# Altium PCB Copy of PCB3.PcbDoc
Units mm, origin at the board's own origin, x right, y up, seen from the top; angles counter-clockwise.
Board outline 100 x 50 mm, 2 copper layers (Top Layer, Bottom Layer); 13 components, 10 nets, 54 pads, 0 vias.
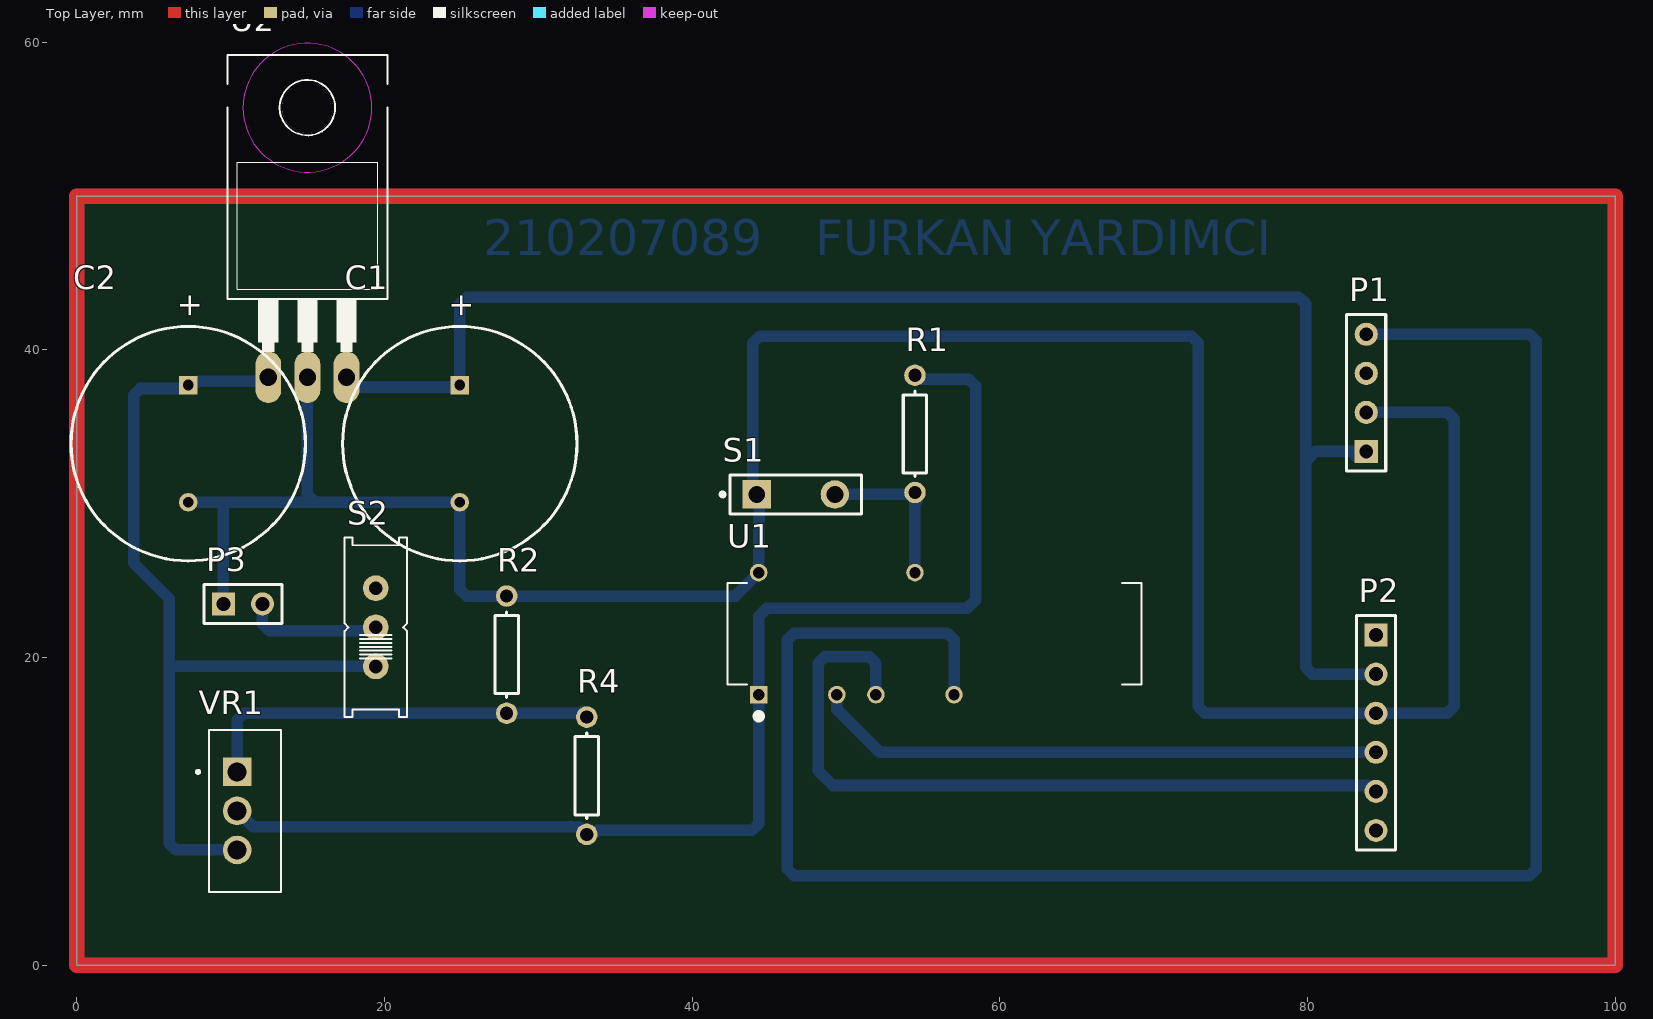
[diagram p0: Top Layer view]
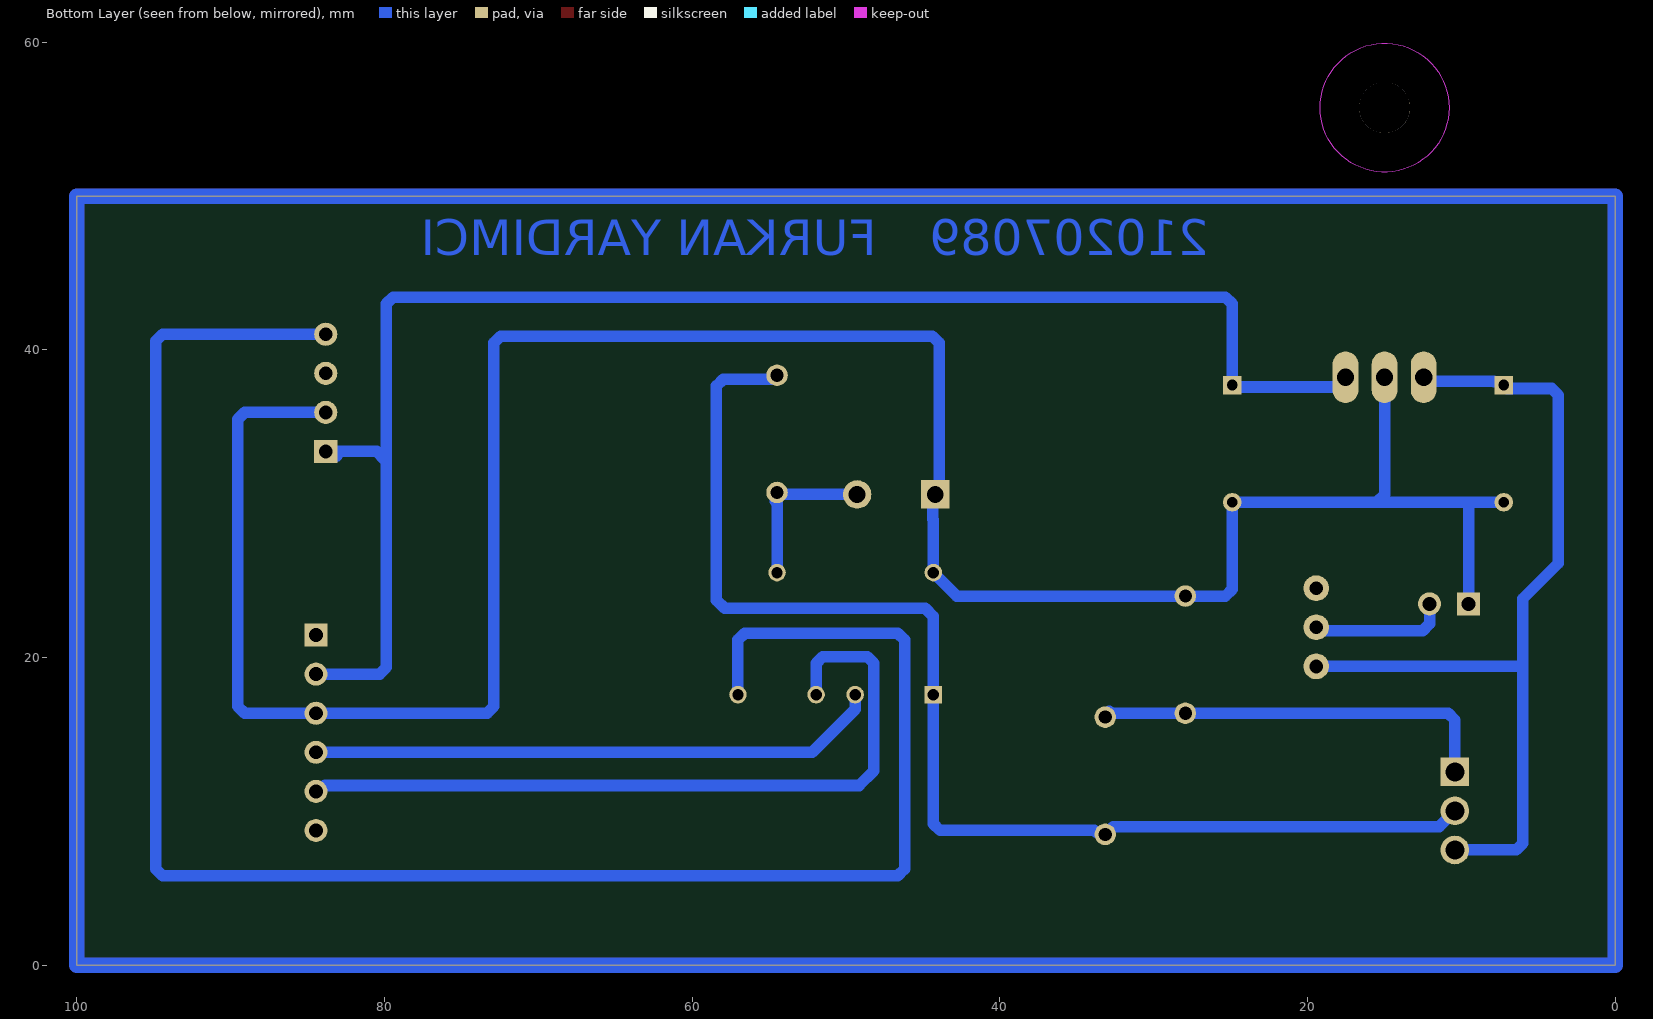
[diagram p1: Bottom Layer view, seen from below]

## Layer stack, top to bottom
Top Solder: solder mask 0.0102, Solder Resist, Dk 3.5
Top Layer: signal copper 0.0356
Dielectric 1: dielectric 0.32, FR-4, Dk 4.8
Bottom Layer: signal copper 0.0356
Bottom Solder: solder mask 0.0102, Solder Resist, Dk 3.5

## Board outline
0,0 0,50 100,50 100,0

## Design rules (kind name [scope] priority, off if disabled: settings)
Clearance [All] p1: gap=0.254 ignorepadtopadclearanceinfootprint=FALSE except(0: Arc-Hole Track-Hole SMDPad-Hole THPad-Hole Via-Hole Fill-Hole Poly-Hole Region-Hole Text-Hole)
PolygonConnect [All] p1: connectstyle=Relief reliefconductorwidth=0.254 reliefentries=4 polygonreliefangle="90 Angle" airgapwidth=0.254
RoutingVias [All] p1: holewidth=0.711 width=1.27 viastyle="Through Hole" minholewidth=0.711 minwidth=1.27 maxholewidth=0.711 maxwidth=1.27
SolderMaskExpansion [All] p1: expansion=0.102 istentingtop=FALSE
Width [All] p1: maxlimit=1 minlimit=0.7 preferedwidth=0.75 minimp=50.000000 maximp=50.000000 favimp=50.000000
30 further rules are at their usual default settings.

## Components (designator, comment, footprint, x,y, rotation, side; value= is the part's Value field where it differs from the comment)
C1 "Cap Pol1" RB7.6-15 24.892,33.909 r90 top value=0.1
C2 "Cap Pol1" RB7.6-15 7.239,33.909 r90 top value=0.1
P1 "Header 4" HDR1X4 83.82,33.401 r90 top
P2 "hc05" HDR1X6 84.455,21.463 r270 top
P3 "Header 2" HDR1X2 9.525,23.495 r0 top
R1 "Res1" AXIAL-0.3 54.483,34.544 r270 top value=10K
R2 "Res1" AXIAL-0.3 27.94,20.193 r90 top value=390
R4 "Res1" AXIAL-0.3 33.147,12.319 r270 top value=220
S1 "SW-PB" SPST-2 46.736,30.607 r0 top
S2 "EG1218" EG1218 19.431,21.971 r90 top
U1 "MSP430G2553IN20" DIP794W45P254L2692H508Q20 55.753,21.557 r90 top
U2 "LM7805" TO220 14.986,44.577 r0 top
VR1 "LM317T" TO254P1054X470X1955-3 10.414,10.033 r270 top

## Footprints (in the part's own frame and the unit in brackets; to place one, negate y for a bottom-side part, rotate by r counter-clockwise, add the part's x,y. Pads: shape width x height; smd on the part's side, far side on the other; paste and mask are expansions set on the pad)
AXIAL-0.3 [mm] "Axial Device, Thru-Hole; 2 Leads; 0.3 in Pin Spacing"
  round 1.4 hole 0.85: 1(-3.81,0) 2(3.81,0)
  silkscreen extent -2.77,-0.76 2.77,0.76
DIP794W45P254L2692H508Q20 [mm]
  rect 1.14x1.14 hole 0.74: 1(-3.97,11.43)
  round 1.14 on Mech1: 2(-3.97,8.89) 5(-3.97,1.27) 7(-3.97,-3.81) 8(-3.97,-6.35) 9(-3.97,-8.89) 10(-3.97,-11.43) 11(3.97,-11.43) 12(3.97,-8.89) 13(3.97,-6.35) 14(3.97,-3.81) 15(3.97,-1.27) 17(3.97,3.81) 18(3.97,6.35) 19(3.97,8.89)
  round 1.14 hole 0.74: 3(-3.97,6.35) 4(-3.97,3.81) 6(-3.97,-1.27) 16(3.97,1.27) 20(3.97,11.43)
  silkscreen extent -5.57,-13.46 3.3,13.46
EG1218 [mil]
  round 66 hole 35.43: O(-100,0) P(0,0) S(100,0)
  silkscreen extent -230,-80 230,80
HDR1X2 [mm] "Connector; Header; 2 Position"
  rect 1.5x1.5 hole 0.9: 1(0,0)
  round 1.5 hole 0.9: 2(2.54,0)
  silkscreen extent -1.27,-1.27 3.81,1.27
HDR1X4 [mm] "Connector; Header; 4 Position"
  rect 1.5x1.5 hole 0.9: 1(0,0)
  round 1.5 hole 0.9: 2(2.54,0) 3(5.08,0) 4(7.62,0)
  silkscreen extent -1.27,-1.27 8.89,1.27
HDR1X6 [mm] "Connector; Header; 6 Position"
  rect 1.5x1.5 hole 0.9: 1(0,0)
  round 1.5 hole 0.9: 2(2.54,0) 3(5.08,0) 4(7.62,0) 5(10.16,0) 6(12.7,0)
  silkscreen extent -1.27,-1.27 13.97,1.27
RB7.6-15 [mm] "Polarized Capacitor (Radial); 2 Leads"
  rect 1.2x1.2 hole 0.7: 1(3.81,0)
  round 1.2 hole 0.7: 2(-3.81,0)
  silkscreen extent -7.62,-7.62 7.62,7.62
SPST-2 [mm] "Switch; 2 Leads"
  rect 1.85x1.85 hole 1.1: 1(-2.54,0)
  round 1.85 hole 1.1: 2(2.54,0)
  silkscreen extent -4.89,-1.27 4.28,1.27
TO220 [mil]
  oval 66x132 hole 44: 1(-100,-250) 2(0,-250) 3(100,-250)
  round 130 hole 130 unplated: ""(0,440)
  Keep-Out Layer circle w0: c0,440 r165
  Keep-Out Layer circle w0: c0,440 r165
  silkscreen extent -205,-185 205,575
TO254P1054X470X1955-3 [mm]
  rect 1.86x1.86 hole 1.24: 1(-2.54,0)
  round 1.86 hole 1.24: 2(0,0) 3(2.54,0)
  silkscreen extent -5.27,-2.64 5.27,2.86

## Part data
C1 C2: "Polarized Capacitor (Radial)", LatestRevisionDate=17-Jul-2002, LatestRevisionNote="Re-released for DXP Platform.", PackageDescription="Polarized Capacitor (Radial); 2 Leads", PackageReference=RB7.6-15, Published=8-Jun-2000, Publisher="Altium Limited"
P1: "Header, 4-Pin", LatestRevisionDate=17-Jul-2002, LatestRevisionNote="Re-released for DXP Platform.", Publisher="Altium Limited"
P2: library part "Header 6", "Header, 6-Pin", LatestRevisionDate=17-Jul-2002, LatestRevisionNote="Re-released for DXP Platform.", Publisher="Altium Limited"
P3: "Header, 2-Pin", LatestRevisionDate=17-Jul-2002, LatestRevisionNote="Re-released for DXP Platform.", Publisher="Altium Limited"
R1 R2 R4: "Resistor", LatestRevisionDate=17-Jul-2002, LatestRevisionNote="Re-released for DXP Platform.", PackageDescription="Axial Device, Thru-Hole; 2 Leads; 0.3 in Pin Spacing", PackageReference=AXIAL-0.3, Published=8-Jun-2000, Publisher="Altium Limited"
S1: "Switch", LatestRevisionDate=17-Jul-2002, LatestRevisionNote="Re-released for DXP Platform.", PackageDescription="Switch; 2 Leads", PackageReference=SPST-2, Published=24-Mar-1999, Publisher="Altium Limited"
S2: "æ»‘å‹•é–‹é—œSPDTé€šå­”", Package="Custom package E-Switch", Availability=Unavailable, MF=E-Switch, MP=EG1218, Price=None, SnapEDA_Link=https://www.snapeda.com/parts/EG1218/E-Switch/view-part/13895/?ref=snap
U1: "MSP430 MSP430G2xx Microcontroller IC 16-Bit 16MHz 16KB _16K x 8_ FLASH 20-PDIP", Package="PDIP-20 Texas Instruments", Availability=Unavailable, MF="Texas Instruments", MP=MSP430G2553IN20, Price=None, SnapEDA_Link=https://www.snapeda.com/parts/MSP430G2553IN20/Texas%20Instruments/view-part/46372/?ref=snap
U2: "Linear Voltage Regulator IC 1 Output 1.5A SOT-223-4", Package="TO-220 Texas Instruments", Availability=Unavailable, MF="Texas Instruments", MP=LM7805, Price=None, SnapEDA_Link=https://www.snapeda.com/parts/LM7805/Texas%20Instruments/view-part/2302466/?ref=snap
VR1: "1.5-A, 40-V, adjustable linear voltage regulator 3-TO-220", Package="TO-220-3 Texas Instruments", Arrow_Electronics-Purchase-URL=https://snapeda.com/shop?store=Arrow+Electronics&id=2756289, Availability=Unavailable, DigiKey-Purchase-URL=https://snapeda.com/shop?store=DigiKey&id=2756289, MF="Texas Instruments", Mouser-Purchase-URL=https://snapeda.com/shop?store=Mouser&id=2756289, MP=LM317T, Price=None, SnapEDA_Link=https://www.snapeda.com/parts/LM317T/Texas%20Instruments/view-part/2756289/?ref=snap

## Nets (pads, with @x,y where several pads share a name; then routed paths per layer and width w, separated by ;. In a path a pad name is that pad's centre, name@x,y a point inside that pad or via, vN(x,y) a via of type N, cw(c..) or ccw(c..) an arc to the next point about the centre after c; other vN are vias at no path point)
GND: C1.2 C2.2 P1.2 P2.3 P3.1 R2.2 S1.1 U1.20 U2.2 | length 168.2
  Bottom Layer w0.75: C2.2 9.652,30.099 ; P3.1 9.525,29.972 9.652,30.099 ; U2.2 14.986,30.607 15.494,30.099 ; P1.2 89.096,35.941 89.535,35.502 89.535,16.822 89.096,16.383 P2.3 73.337,16.383 72.898,16.822 72.898,40.455 72.459,40.894 44.381,40.894 43.942,40.455 43.942,30.942 44.363,30.52 44.363,28.996 44.323,28.956 U1.20 42.799,24.003 25.331,24.003 24.892,24.442 C1.2 15.494,30.099 ; 9.652,30.099 15.494,30.099
NetC1_1: C1.1 P1.1 P2.2 U2.3 | length 101.9
  Bottom Layer w0.75: U2.3 17.526,38.02 17.954,37.592 24.892,37.592 24.892,42.995 25.331,43.434 79.444,43.434 79.883,42.995 79.883,32.893 ; P1.1@83.121,33.084 83.502,33.084 P1.1 83.502,33.401 83.121,33.401 80.518,33.401 80.01,32.893 79.883,32.893 ; P2.2 80.322,18.923 79.883,19.362 79.883,32.893
NetC2_1: C2.1 S2.O U2.1 VR1.3 | length 57
  Bottom Layer w0.75: C2.1 7.014,37.494 4.122,37.494 3.683,37.055 3.683,26.148 5.994,23.837 5.994,19.431 ; C2.1@7.464,37.944 7.874,37.944 7.903,37.973 12.192,37.973 U2.1 ; VR1.3 6.434,7.493 5.994,7.932 5.994,19.431 ; S2.O 5.994,19.431
NetP1_4: P1.4 U1.6 | length 124.2
  Bottom Layer w0.75: U1.6 57.023,21.151 56.584,21.59 46.633,21.59 46.194,21.151 46.194,6.256 46.633,5.817 94.43,5.817 94.869,6.256 94.869,40.582 94.43,41.021 P1.4
NetP2_4: P2.4 U1.3 | length 37.2
  Bottom Layer w0.75: U1.3 49.403,16.637 52.197,13.843 P2.4
NetP2_5: P2.5 U1.4 | length 50
  Bottom Layer w0.75: U1.4 51.943,19.627 51.504,20.066 48.623,20.066 48.184,19.627 48.184,12.649 49.149,11.684 83.871,11.684 84.252,11.303 P2.5
NetP3_2: P3.2 S2.P | length 8.9
  Bottom Layer w0.75: P3.2 12.065,22.193 12.504,21.753 18.963,21.753 19.18,21.971 S2.P
NetR1_1: R1.1 R4.2 U1.1 VR1.2 | length 80.4
  Bottom Layer w0.75: VR1.2 11.43,9.017 32.639,9.017 R4.2@32.954,8.702 ; R4.2 33.271,8.633 33.731,8.633 33.861,8.763 43.884,8.763 44.323,9.202 U1.1 44.323,22.675 44.852,23.204 57.891,23.204 58.42,23.733 58.42,37.661 57.981,38.1 R1.1@54.737,38.1
NetR1_2: R1.2 S1.2 U1.16 | length 11.3
  Bottom Layer w0.75: S1.2@48.778,30.607 54.434,30.607 54.561,30.734 54.737,30.734 54.613,30.61 54.613,30.15 54.483,30.02 U1.16
NetR2_1: R2.1 R4.1 VR1.1 | length 26.1
  Bottom Layer w0.75: VR1.1 10.414,15.944 10.853,16.383 28.24,16.383 32.766,16.383 R4.1@32.896,16.513
pads on no net: P1.3 P2.1 P2.6 S2.S U1.2 U1.5 U1.7 U1.8 U1.9 U1.10 U1.11 U1.12 U1.13 U1.14 U1.15 U1.17 U1.18 U1.19 U2.

## Other copper
Bottom Layer:
  text "210207089" at 26.416,45.387 h4
  text "FURKAN YARDIMCI" at 48.006,45.387 h4
Multi-Layer:
  the board outline again, w1

## Text inside footprints (layer, text, board x,y; h text height)
C1: Top Overlay "+" at 25.629,42.041 h1.5 r90
C2: Top Overlay "+" at 7.976,42.041 h1.5 r90
U2: Mechanical 13 "3" at 16.891,44.577 h1.27; Mechanical 13 "2" at 14.35,44.577 h1.27; Mechanical 13 "1" at 11.805,44.577 h1.27